# EAGLE board RelayBoard (EAGLE 9.7.0)
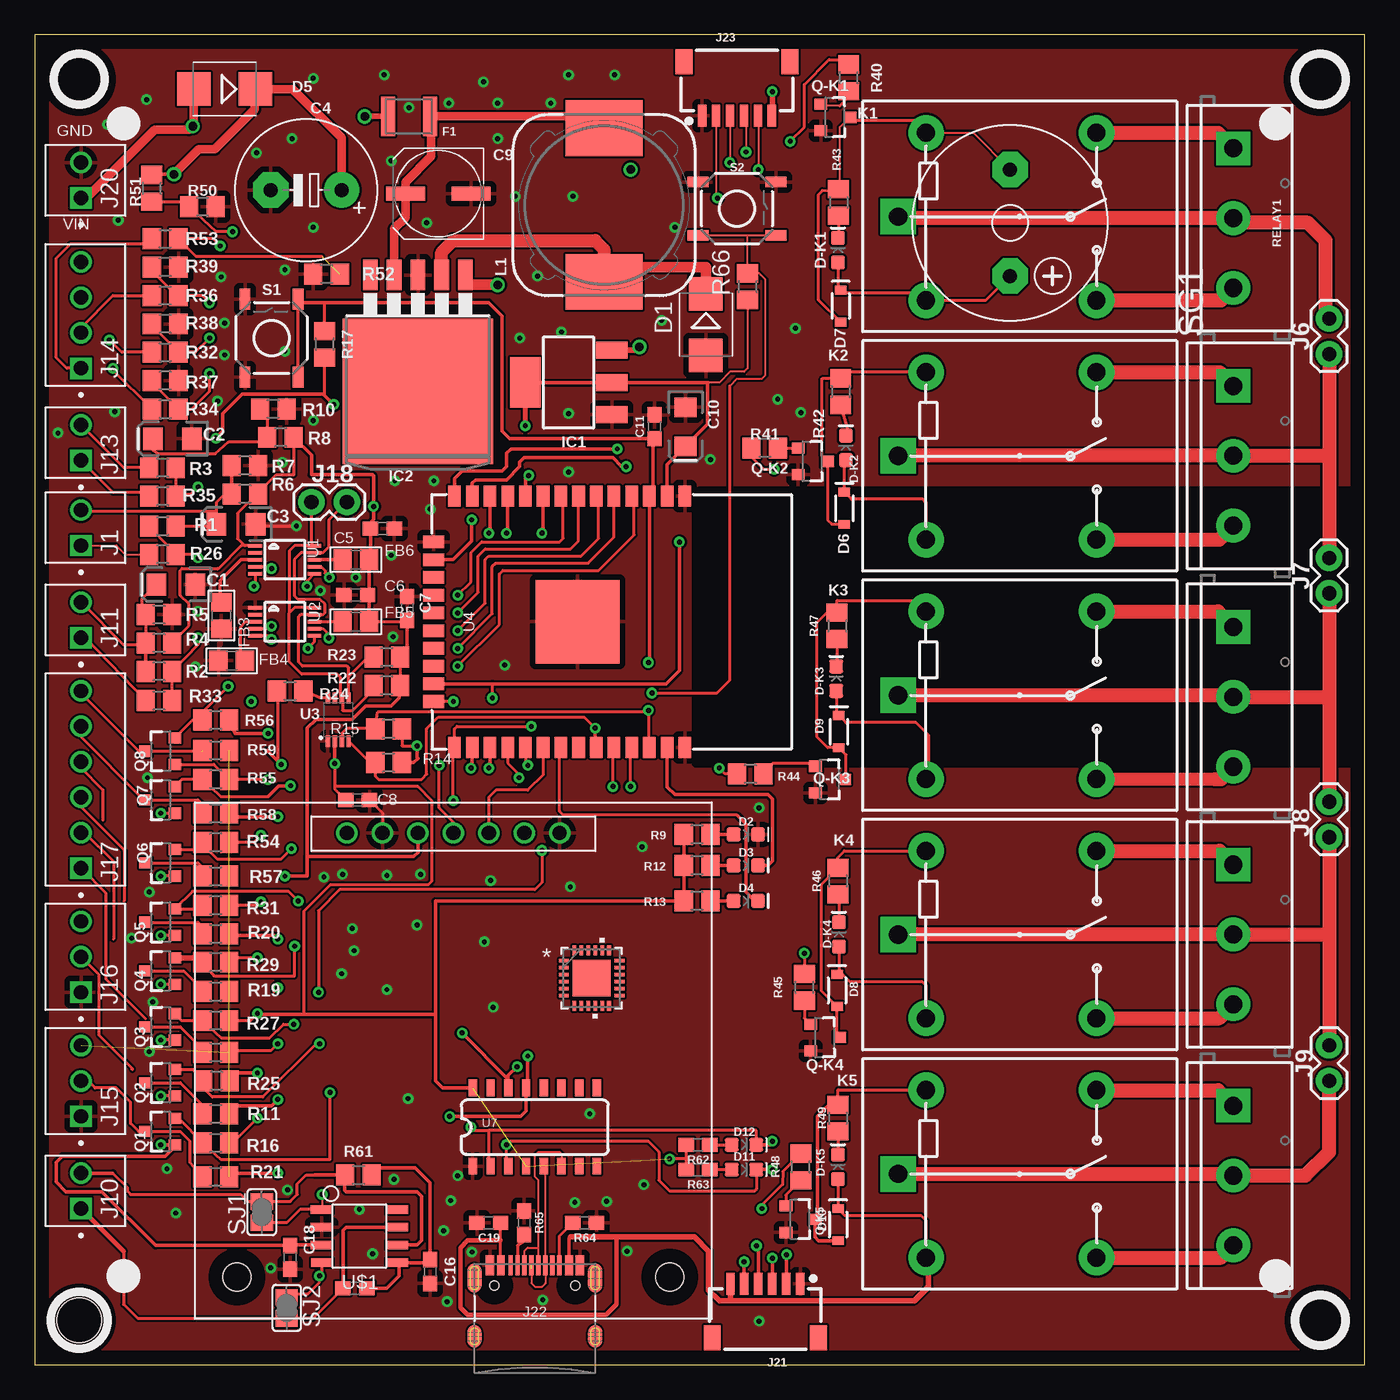
[diagram p0: board, top side]
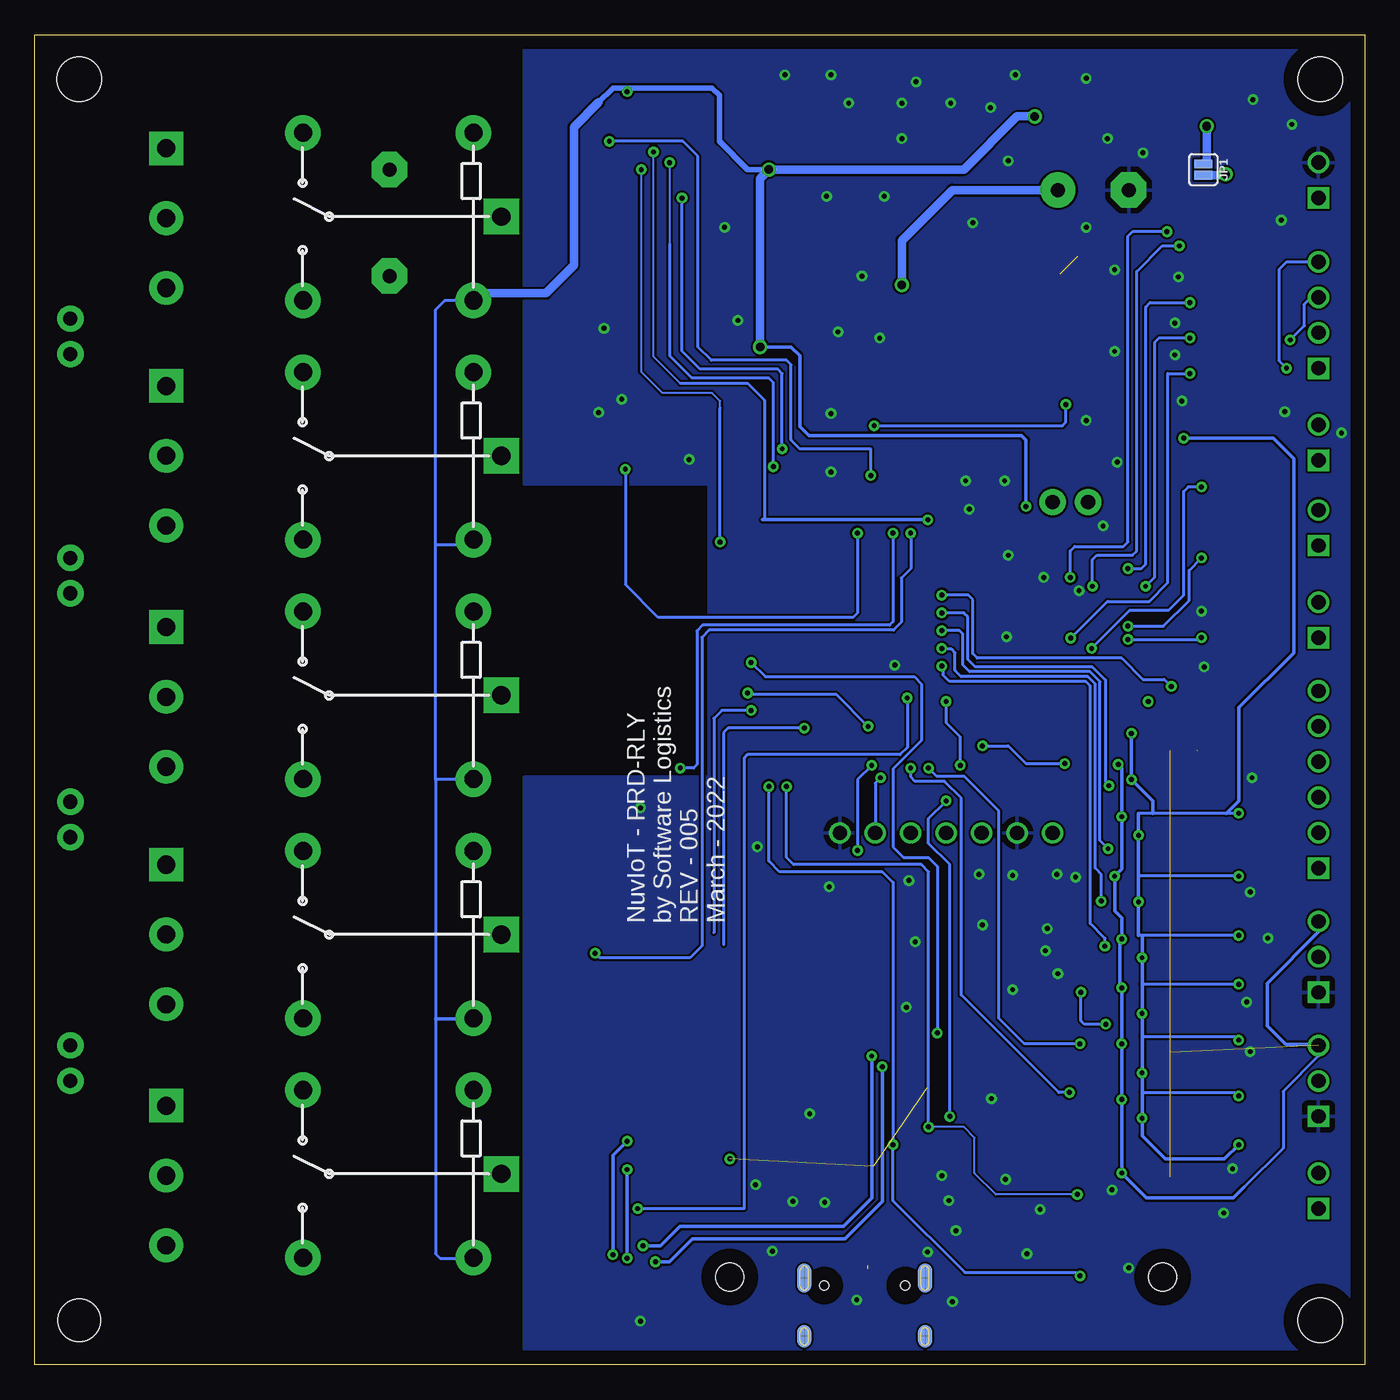
[diagram p1: board, bottom side, seen from below]

Size 95.25 x 95.25 mm. Coordinates in mm from the lower left corner, seen from the top.
Outline: 0,0 95.25,0 95.25,95.25 0,95.25 0,0
Copper layers (1*16): Top 0.035mm / dielectric 1.5mm / Bottom 0.035mm
Design rules "Fusion Electronics Design Rules": minimum track width 6mil, minimum drill 0.35mm, track to track 6mil, track to pad 6mil, pad to pad 6mil, via to via 6mil, smd to smd 6mil, copper to edge 40mil, drill to drill 6mil, minimum pad ring 10mil, minimum via ring 8mil, stop-mask expansion 4mil, vias tented up to drill 0mil, thermal gap 16mil
Net classes: 1 5V Power: width 0.203 mm; 2 VCC: width 0.25 mm; 3 LOGIC: width 0.203 mm
Holes 3.17 mm at 92.08,92.08 3.17,3.17 3.17,92.08
Holes 3.05 mm at 92.08,3.17

## Footprints (pad centres in the part's own frame; a part is rotated, then mirrored left to right if it is on the bottom)
EIA3216 = smd 1.4 x 1.6: + 1.4,0; - -1.4,0
E5-10,5 = drill 1.016 pad 2.54: + -2.54,0 | drill 1.016 pad 2.54 octagon: - 2.54,0
0603 = smd 1.1 x 1: 1 -0.85,0; 2 0.85,0
UD-6,3X5,8_NICHICON = smd 2.8 x 1: + 2.35,0; - -2.35,0
SMB = smd 2.4 x 2.4: A 2.2,0; C -2.2,0
LED-0603 = smd 1 x 1: A -0.877,0; C 0.877,0
LED-0603@1 = smd 1 x 1: A -0.877,0; C 0.877,0
SOD-323 = smd 0.63 x 0.83: A 1.15,0; C -1.15,0
1210 = smd 1 x 2.8: 1 -1.5,0; 2 1.5,0
0805 = smd 1.3 x 1.5: 1 -0.95,0; 2 0.95,0
SOT223 = smd 1.219 x 2.235: 1 -2.311,-3.099; 2 0,-3.099; 3 2.311,-3.099 | smd 3.6 x 2.2: TAB 0,3.099
TO263-5 = smd 1.067 x 2.159: 1 -3.404,-5.791; 2 -1.702,-5.791; 3 0,-5.791; 4 1.702,-5.791; 5 3.404,-5.791 | smd 10.8 x 10.41: 6 0,2.54
TE_640456-2 = drill 1.02 pad 1.37 square: 1 0,0 | drill 1.02 pad 1.37: 2 -2.54,0
1X02 = drill 1.016 pad 1.88: 1 0,0; 2 2.54,0
TE_640456-4 = drill 1.02 pad 1.37 square: 1 0,0 | drill 1.02 pad 1.37: 2 -2.54,0; 3 -5.08,0; 4 -7.62,0
TE_640456-3 = drill 1.02 pad 1.37 square: 1 0,0 | drill 1.02 pad 1.37: 2 -2.54,0; 3 -5.08,0
TE_640456-6 = drill 1.02 pad 1.37 square: 1 0,0 | drill 1.02 pad 1.37: 2 -2.54,0; 3 -5.08,0; 4 -7.62,0; 5 -10.16,0; 6 -12.7,0
SIM7000A = drill 1.016: GND -16.3,7.62; GND2 -16.3,-5.08; PWRKEY -16.3,0; RX -16.3,5.08; SLEEP -16.3,-7.62; TX -16.3,2.54; VCC -16.3,-2.54 | hole 2: 15.5,-15.5; 15.5,15.5
JST-6-SMD-HORI-1.0MM = smd 0.6 x 1.55: 1 -2.5,-4.775; 2 -1.5,-4.775; 3 -0.5,-4.775; 4 0.5,-4.775; 5 1.5,-4.775; 6 2.5,-4.775 | smd 1.2 x 1.8: M1 -3.8,-0.9; M2 3.8,-0.9
USB-C-16P = smd 0.3 x 1.45: A5 -1.25,0; A6 -0.25,0; A7 0.25,0; A8 1.25,0; B5 1.75,0; B6 0.75,0; B7 -0.75,0; B8 -1.75,0 | smd 0.6 x 1.45: GND -3.225,0; GND2 3.225,0 | smd 1 x 2.1: SHLD1 -4.32,-0.915; SHLD2 4.32,-0.915 | smd 1 x 2.1 bottom: SHLD3 -4.32,-0.915; SHLD4 4.32,-0.915 | smd 1 x 1.6: SHLD5 -4.32,-5.095; SHLD8 4.32,-5.095 | smd 1 x 1.6 bottom: SHLD6 -4.32,-5.095; SHLD7 4.32,-5.095 | smd 0.55 x 1.45: VBUS1 -2.45,0; VBUS2 2.45,0 | hole 0.65: -2.89,-1.445; 2.89,-1.445
SMT-JUMPER_2_NO_SILK = smd 0.635 x 1.27: 1 -0.406,0; 2 0.406,0
RELAY_G5LE = drill 1.3 pad 2.54 square: 1 8.52,-0.005 | drill 1.3 pad 2.54: 2 6.52,5.995; 3 -5.68,5.995; 4 -5.68,-6.005; 5 6.52,-6.005
CDRH127/LD = smd 4 x 5.5: 1 -5.5,0; 2 5.5,0
SOT23-3 = smd 0.8 x 0.9: 1 -0.95,-1; 2 0.95,-1; 3 0,1.1
R0805 = smd 1.3 x 1.5: 1 -0.95,0; 2 0.95,0
SCREWTERMINAL-5MM-3 = drill 1.3 pad 2.413 square: 1 0,0 | drill 1.3 pad 2.413: 2 5,0; 3 10,0
TACTILE_SWITCH_SMD_5.2MM = smd 1.524 x 0.762: 1 -2.794,1.905; 2 2.794,1.905; 3 -2.794,-1.905; 4 2.794,-1.905
F/CM12P = drill 1.016 pad 2.54 octagon: + 3.81,0; - -3.81,0
SJ = smd 1.168 x 1.6: 1 -0.762,0; 2 0.762,0
MSOP10 = smd 0.25 x 1: 1 -1,-2.113; 2 -0.5,-2.113; 3 0,-2.113; 4 0.5,-2.113; 5 1,-2.113; 6 1,2.113; 7 0.5,2.113; 8 0,2.113; 9 -0.5,2.113; 10 -1,2.113
VSSOP_8PIN = smd 0.8 x 0.3: P1 -1.57,0.734; P2 -1.57,0.234; P3 -1.57,-0.266; P4 -1.57,-0.766; P5 1.53,-0.766; P6 1.53,-0.266; P7 1.53,0.234; P8 1.53,0.734
ESP-WROOM-32 = smd 0.9 x 1.5: 1 7.7,9; 2 6.43,9; 3 5.16,9; 4 3.89,9; 5 2.62,9; 6 1.35,9; 7 0.08,9; 8 -1.19,9; 9 -2.46,9; 10 -3.73,9; 11 -5,9; 12 -6.27,9; 13 -7.54,9; 14 -8.81,9; 25 -8.81,-9; 26 -7.54,-9; 27 -6.27,-9; 28 -5,-9; 29 -3.73,-9; 30 -2.46,-9; 31 -1.19,-9; 32 0.08,-9; 33 1.35,-9; 34 2.62,-9; 35 3.89,-9; 36 5.16,-9; 37 6.43,-9; 38 7.7,-9 | smd 1.5 x 0.9: 15 -10.3,5.715; 16 -10.3,4.445; 17 -10.3,3.175; 18 -10.3,1.905; 19 -10.3,0.635; 20 -10.3,-0.635; 21 -10.3,-1.905; 22 -10.3,-3.175; 23 -10.3,-4.445; 24 -10.3,-5.715 | smd 6 x 6: GND 0,0
SO016 = smd 0.6 x 1.2: 1 -4.445,-2.8; 2 -3.175,-2.8; 3 -1.905,-2.8; 4 -0.635,-2.8; 5 0.635,-2.8; 6 1.905,-2.8; 7 3.175,-2.8; 8 4.445,-2.8; 9 4.445,2.8; 10 3.175,2.8; 11 1.905,2.8; 12 0.635,2.8; 13 -0.635,2.8; 14 -1.905,2.8; 15 -3.175,2.8; 16 -4.445,2.8
QFN24_4X4X0P9_IVS = smd 0.711 x 0.254: 1 -1.994,1.25; 2 -1.994,0.75; 3 -1.994,0.25; 4 -1.994,-0.25; 5 -1.994,-0.75; 6 -1.994,-1.25; 13 1.994,-1.25; 14 1.994,-0.75; 15 1.994,-0.25; 16 1.994,0.25; 17 1.994,0.75; 18 1.994,1.25 | smd 0.254 x 0.711: 7 -1.25,-1.994; 8 -0.75,-1.994; 9 -0.25,-1.994; 10 0.25,-1.994; 11 0.75,-1.994; 12 1.25,-1.994; 19 1.25,1.994; 20 0.75,1.994; 21 0.25,1.994; 22 -0.25,1.994; 23 -0.75,1.994; 24 -1.25,1.994 | smd 2.743 x 2.642: 25 0,0
SN65HVD230 = smd 1.549 x 0.61: CANH 2.705,0.635; CANL 2.705,-0.635; GND -2.705,0.635; RS 2.705,1.905; RX -2.692,-1.905; TX -2.705,1.905; VCC -2.705,-0.635; VREF 2.705,-1.905

## Placement (x,y rotation side)
C1  10uF  [EIA3216]  10.1,55.88 180 top
C2  10uF  [EIA3216]  9.84,66.32 180 top
C3  10uF  [EIA3216]  14.41,60.2 180 top
C4  680uF  [E5-10,5]  19.43,84.14 180 top
C5  1.0uF  [0603]  24.89,59.88 180 top
C6  1.0uF  [0603]  22.99,55.12 0 top
C7  1.0uF  [0603]  26.67,54.17 270 top
C8  1.0uF  [0603]  23.11,40.45 180 top
C9  220uF  [UD-6,3X5,8_NICHICON]  28.89,83.88 180 top
C10  10uF  [EIA3216]  46.61,67.18 270 top
C11  2.2uF  [0603]  44.39,67.18 90 top
C16  2.2uF  [0603]  28.32,6.67 270 top
C18  1.0uF  [0603]  18.29,7.68 90 top
C19  0.1uF  [0603]  32.51,10.16 180 top
D1  [SMB]  48.07,74.49 270 top
D2  GREEN  [LED-0603]  50.93,37.97 0 top
D3  BLUE  [LED-0603@1]  50.93,35.75 0 top
D4  RED  [LED-0603@1]  50.93,33.21 0 top
D5  1N4002  [SMB]  13.59,91.38 180 top
D6  250mA/100V  [SOD-323]  57.98,61.35 270 top
D7  250mA/100V  [SOD-323]  57.72,75.83 270 top
D8  250mA/100V  [SOD-323]  57.47,26.8 270 top
D9  250mA/100V  [SOD-323]  57.59,45.34 270 top
D10  250mA/100V  [SOD-323]  57.53,10.03 270 top
D11  BLUE  [LED-0603]  50.8,13.97 0 top
D12  BLUE  [LED-0603]  50.8,15.75 0 top
D-K1  BLUE  [LED-0603@1]  57.53,79.83 90 top
D-K2  BLUE  [LED-0603@1]  58.1,65.67 90 top
D-K3  BLUE  [LED-0603@1]  57.41,49.14 90 top
D-K4  BLUE  [LED-0603@1]  57.59,30.81 90 top
D-K5  BLUE  [LED-0603@1]  57.53,14.16 90 top
F1  6V/2A  [1210]  26.8,89.41 180 top
FB3  MMZ2012Y152B  [0805]  13.36,53.66 270 top
FB4  MMZ2012Y152B  [0805]  14.1,50.42 180 top
FB5  MMZ2012Y152B  [0805]  22.99,53.21 0 top
FB6  MMZ2012Y152B  [0805]  22.99,57.66 0 top
IC1  [SOT223]  38.23,70.36 90 top
IC2  LM2596S  [TO263-5]  27.43,72.26 180 top
J1  640456-2  [TE_640456-2]  3.3,58.67 270 top
J6  [1X02]  92.71,74.93 270 top
J7  [1X02]  92.71,57.78 270 top
J8  [1X02]  92.71,40.32 270 top
J9  [1X02]  92.71,22.86 270 top
J10  640456-2  [TE_640456-2]  3.3,11.18 270 top
J11  640456-2  [TE_640456-2]  3.3,52.07 270 top
J13  640456-2  [TE_640456-2]  3.3,64.77 270 top
J14  640456-4  [TE_640456-4]  3.3,71.37 270 top
J15  640456-3  [TE_640456-3]  3.3,17.78 270 top
J16  640456-3  [TE_640456-3]  3.3,26.67 270 top
J17  640456-6  [TE_640456-6]  3.3,35.56 270 top
J18  [1X02]  19.81,61.79 0 top
J19  SIM7000A  [SIM7000A]  29.97,21.78 270 top
J20  640456-2  [TE_640456-2]  3.3,83.57 270 top
J21  BM06B-SRSS-TB  [JST-6-SMD-HORI-1.0MM]  52.32,1.02 180 top
J22  [USB-C-16P]  35.81,7.11 0 top
J23  BM06B-SRSS-TB  [JST-6-SMD-HORI-1.0MM]  50.29,94.23 0 top
JP1  JUMPER-SMT_2_NO_SILK  [SMT-JUMPER_2_NO_SILK]  11.56,85.6 270 bottom
K1  RELAY-SPDT  [RELAY_G5LE]  70.36,82.23 180 top
K2  RELAY-SPDT  [RELAY_G5LE]  70.36,65.09 180 top
K3  RELAY-SPDT  [RELAY_G5LE]  70.36,47.94 180 top
K4  RELAY-SPDT  [RELAY_G5LE]  70.36,30.8 180 top
K5  RELAY-SPDT  [RELAY_G5LE]  70.36,13.65 180 top
L1  CDRH127/LD  [CDRH127/LD]  40.77,83.06 90 top
Q1  BSS138  [SOT23-3]  9.02,16.7 90 top
Q2  BSS138  [SOT23-3]  9.02,20.19 90 top
Q3  BSS138  [SOT23-3]  9.02,24.19 90 top
Q4  BSS138  [SOT23-3]  9.02,28.19 90 top
Q5  BSS138  [SOT23-3]  9.02,31.69 90 top
Q6  BSS138  [SOT23-3]  9.02,35.94 90 top
Q7  BSS138  [SOT23-3]  9.02,40.45 90 top
Q8  BSS138  [SOT23-3]  9.02,43.94 90 top
Q-K1  600mA/40V  [SOT23-3]  57.29,89.34 270 top
Q-K2  600mA/40V  [SOT23-3]  55.67,64.7 270 top
Q-K3  600mA/40V  [SOT23-3]  56.91,41.91 270 top
Q-K4  600mA/40V  [SOT23-3]  56.56,23.43 270 top
Q-K5  600mA/40V  [SOT23-3]  54.8,10.41 270 top
R1  10k  [R0805]  9.14,60.07 0 top
R2  10k  [R0805]  8.89,49.66 180 top
R3  10k  [R0805]  9.14,64.24 180 top
R4  10k  [R0805]  8.89,51.69 180 top
R5  10k  [R0805]  8.89,53.72 180 top
R6  10k  [R0805]  15.05,62.36 180 top
R7  10k  [R0805]  15.05,64.4 180 top
R8  10k  [R0805]  17.59,66.42 180 top
R9  1k  [R0805]  47.43,37.97 180 top
R10  10k  [R0805]  17.08,68.45 180 top
R11  10k  [R0805]  12.95,17.97 0 top
R12  1k  [R0805]  47.43,35.75 180 top
R13  1k  [R0805]  47.43,33.21 180 top
R14  10k  [R0805]  25.34,43.12 180 top
R15  10k  [R0805]  25.34,45.53 180 top
R16  10k  [R0805]  12.95,15.88 180 top
R17  10k  [R0805]  20.76,73.09 90 top
R18  10k  [R0805]  12.95,22.38 0 top
R19  10k  [R0805]  12.95,26.73 0 top
R20  10k  [R0805]  12.95,30.86 0 top
R21  10k  [R0805]  12.95,13.46 0 top
R22  10k  [R0805]  25.21,48.64 180 top
R23  10k  [R0805]  25.21,50.67 180 top
R24  200k  [R0805]  18.29,48.26 0 top
R25  10k  [R0805]  13,20.32 180 top
R26  0 ohms  [R0805]  9.14,58.04 180 top
R27  10k  [R0805]  12.95,24.64 180 top
R29  10k  [R0805]  12.95,28.83 180 top
R31  10K  [R0805]  12.95,32.89 180 top
R32  10K  [R0805]  9.33,72.52 0 top
R33  0 ohms  [R0805]  8.89,47.56 180 top
R34  10K  [R0805]  9.33,68.45 0 top
R35  0 ohms  [R0805]  9.14,62.2 180 top
R36  0 ohms  [R0805]  9.33,76.58 0 top
R37  10K  [R0805]  9.33,70.48 180 top
R38  10k  [R0805]  9.33,74.55 180 top
R39  10k  [R0805]  9.33,78.61 180 top
R40  1k  [R0805]  58.29,92.18 90 top
R41  1k  [R0805]  52.28,65.66 180 top
R42  1k  [R0805]  57.72,69.7 270 top
R43  1k  [R0805]  57.57,83.25 270 top
R44  1k  [R0805]  51.24,42.32 180 top
R45  1k  [R0805]  55.12,27.03 90 top
R46  1k  [R0805]  57.53,34.63 270 top
R47  1k  [R0805]  57.47,52.92 270 top
R48  1k  [R0805]  54.86,14.16 90 top
R49  1k  [R0805]  57.53,17.65 270 top
R50  10k  [R0805]  12,82.93 180 top
R51  30K  [R0805]  8.38,84.26 90 top
R52  10k  [R0805]  20.89,78.11 180 top
R53  0 ohms  [R0805]  9.33,80.64 0 top
R54  10k  [R0805]  12.95,37.4 180 top
R55  10k  [R0805]  12.95,41.91 180 top
R56  10K  [R0805]  12.95,46.16 180 top
R57  10k  [R0805]  12.95,34.99 0 top
R58  10k  [R0805]  12.95,39.5 0 top
R59  10k  [R0805]  12.95,44.01 0 top
R60  1k  [0603]  22.92,5.46 180 top
R61  1k  [R0805]  23.18,13.59 0 top
R62  1k  [0603]  47.5,15.75 180 top
R63  1k  [0603]  47.5,13.97 180 top
R64  5.1k  [0603]  39.37,10.16 180 top
R65  5.1k  [0603]  35.05,10.16 270 top
R66  10k  [R0805]  51.05,77.22 90 top
RELAY1  455-1750-1-ND  [SCREWTERMINAL-5MM-3]  85.85,87.12 270 top
RELAY2  455-1750-1-ND  [SCREWTERMINAL-5MM-3]  85.85,70.1 270 top
RELAY3  455-1750-1-ND  [SCREWTERMINAL-5MM-3]  85.85,52.83 270 top
RELAY4  455-1750-1-ND  [SCREWTERMINAL-5MM-3]  85.85,35.81 270 top
RELAY5  455-1750-1-ND  [SCREWTERMINAL-5MM-3]  85.85,18.54 270 top
S1  MOMENTARY-SWITCH-SPST-SMD-5.2-REDUNDANT  [TACTILE_SWITCH_SMD_5.2MM]  16.95,73.53 90 top
S2  MOMENTARY-SWITCH-SPST-SMD-5.2-REDUNDANT  [TACTILE_SWITCH_SMD_5.2MM]  50.29,82.8 0 top
SG1  F/CM12P  [F/CM12P]  69.85,81.79 270 top
SJ1  [SJ]  16.26,10.92 90 top
SJ2  [SJ]  18.03,4.06 270 top
U1  ADS1115IDGST  [MSOP10]  17.91,57.66 270 top
U2  ADS1115IDGST  [MSOP10]  17.91,53.21 270 top
U3  [VSSOP_8PIN]  21.72,46.23 90 top
U4  ESP-WROOM-32  [ESP-WROOM-32]  38.86,53.21 0 top
U7  CH340C  [SO016]  35.81,17.02 0 top
U8  MPU-6050QFN24_4X4X0P9_IVS  [QFN24_4X4X0P9_IVS]  39.88,27.69 0 top
U$2  SN65HVD230  [SN65HVD230]  23.24,9.21 0 top

## Library data of the parts
C1-C3 C10 = SparkFun-Capacitors; PROD_ID: CAP-00811
C4 = rcl; VOLTAGE: 25V
C5-C8 C18 = SparkFun-Capacitors; PROD_ID: CAP-00868
C9 = rcl; VOLTAGE: 6.3V
C11 C16 = SparkFun-Capacitors; PROD_ID: CAP-07888
C19 = SparkFun-Capacitors; PROD_ID: CAP-00810
D1 D5 = diode
D2 D11 = SparkFun-LED; PROD_ID: DIO-00821
D3 D-K1-D-K5 = SparkFun-LED; PROD_ID: DIO-08575
D4 = SparkFun-LED; PROD_ID: DIO-00819
D6-D10 = SparkFun-DiscreteSemi; PROD_ID: DIO-09646
D12 = SparkFun-LED; PROD_ID: DIO-09003
F1 = SparkFun-Fuses; PROD_ID: RES-14313
FB3-FB6 U1 U2 = microbuilder
IC1 = lm1117
IC2 = national-semiconductor; MF: NATIONAL SEMICONDUCTOR; MPN: LM2596S-ADJ/NOPB; OC_FARNELL: 9494367; OC_NEWARK: 41K3842
J1 J10 J11 J13 J20 = 640456-2; COMMENT: 640456-2; DESCRIPTION: Connector Header Through Hole 2 position 0.100 (2.54mm); DIGI-KEY_PART_NUMBER: A1921-ND; EU_ROHS_COMPLIANCE: Compliant; MF: TE Connectivity; MP: 640456-2; PACKAGE: None; PURCHASE-URL: https://pricing.snapeda.com/search/part/640456-2/?ref=eda
J6-J9 J18 = SparkFun-Connectors
J14 = 640456-4; CENTERLINE_PITCH: 2.54 mm[.1 in]; COMMENT: 640456-4; DESCRIPTION: Header, Friction Lock; MTA-100; 4; 250 VAC; Polyester; Tin; Copper Alloy; Tin; DIGI-KEY_PART_NUMBER: A1922-ND; EU_ROHS_COMPLIANCE: Compliant; MF: TE Connectivity; MP: 640456-4; NUMBER_OF_POSITIONS: 4; PACKAGE: None; PRODUCT_TYPE: Connector; PURCHASE-URL: https://pricing.snapeda.com/search/part/640456-4/?ref=eda
J15 J16 = 640456-3; COMMENT: 640456-3; DESCRIPTION: Connector Header Through Hole 3 position 0.100 (2.54mm); DIGI-KEY_PART_NUMBER: A19470-ND; EU_ROHS_COMPLIANCE: Compliant; MF: TE Connectivity; MP: 640456-3; PACKAGE: None; PURCHASE-URL: https://pricing.snapeda.com/search/part/640456-3/?ref=eda
J17 = 640456-6; CENTERLINE_PITCH: 2.54 mm[.1 in]; COMMENT: 640456-6; DESCRIPTION: Header, Friction Lock; MTA-100; 6; 250 VAC; Polyester; Tin; Copper Alloy; Tin; DIGI-KEY_PART_NUMBER: A1923-ND; EU_ROHS_COMPLIANCE: Compliant; MF: TE Connectivity; MP: 640456-6; NUMBER_OF_POSITIONS: 6; PACKAGE: None; PRODUCT_TYPE: Connector; PURCHASE-URL: https://pricing.snapeda.com/search/part/640456-6/?ref=eda
J19 U$2 = SoftwareLogisticsParts
J21 J23 = SparkFun-Connectors; PROD_ID: XXX-00000
J22 = SparkFun-Connectors; PROD_ID: CONN-14122
JP1 = SparkFun-Jumpers
K1-K5 = SparkFun-Electromechanical; PROD_ID: COMP-14214
L1 = inductor-sumida
Q1-Q8 = SparkFun
Q-K1-Q-K5 = SparkFun-DiscreteSemi; PROD_ID: TRANS-08049
R1-R27 R29 R31-R59 R61 R66 = rcl; SPICEPREFIX: R
R60 R62 R63 = SparkFun-Resistors; PROD_ID: RES-07856
R64 R65 = SparkFun-Resistors; PROD_ID: RES-12083
RELAY1-RELAY5 = SparkFun-Connectors; PROD_ID: CONN-10134; SF_SKU: PRT-08433
S1 S2 = SparkFun-Switches; PROD_ID: SWCH-08247; SF_SKU: COM-08720
SG1 = buzzer; OC_FARNELL: unknown; OC_NEWARK: unknown
SJ1 SJ2 = jumper
U3 = SparkFun-IC-Comms; PROD_ID: IC-14450
U4 = esp32
U7 = SparkFun-IC-Comms; PROD_ID: IC-14038
U8 = 2024-01-01_22-56-14_Library; COPYRIGHT: Copyright (C) 2024 Ultra Librarian. All rights reserved.; MANUFACTURER_PART_NUMBER: MPU-6050; MFR_NAME: InvenSense

## Nets
3.3V: C8.2 C10.+ C18.2 IC1.2 IC1.TAB Q1.1 Q2.1 Q3.1 Q4.1 Q5.1 Q6.1 Q7.1 Q8.1 R9.2 R12.2 R13.2 R14.1 R15.1 R16.1 R17.1 R25.1 R27.1 R29.1 R31.1 R54.1 R55.1 R56.1 R62.2 R63.2 R66.1 U3.P2 U4.2 U7.4 U7.16 U$2.VCC
5V [5V Power]: J15.3 J16.3 R11.2 R18.2 R19.2 R20.2 R21.2 R57.2 R58.2 R59.2
5VREF-EN: R24.2 U3.P7 U3.P8
+5V [5V Power]: C5.2 C6.2 C7.2 C19.1 D6.C D7.C D8.C D9.C D10.C D-K1.A D-K2.A D-K3.A D-K4.A D-K5.A F1.2 FB5.2 FB6.2 IC1.3 J19.VCC J21.6 J22.VBUS1 J22.VBUS2 J23.6 K1.2 K2.2 K3.2 K4.2 K5.2 R4.1 R6.1 R8.1 R22.1 R23.1 R24.1 SG1.+ U1.1
ADC1: R2.1 R33.1 U2.5
ADC1-IN: J11.1 R33.2
ADC1-NEG: C1.+ J11.2 R2.2 R4.2 R5.2
ADC2 [ADC]: R1.1 R26.1 U2.4
ADC2-NEG: C3.+ J1.2 R1.2 R6.2 R7.2
ADC3 [ADC]: R3.1 R35.1 U2.6
ADC3-IN: J13.1 R35.2
ADC3-NEG: C2.+ J13.2 R3.2 R8.2 R10.2
ADC4 [ADC]: R34.2 R37.2 U2.7
ADC4-IN: J14.4 R34.1
ADC5 [ADC]: R32.2 R38.2 U1.5
ADC5-IN: J14.3 R32.1
ADC6 [ADC]: R36.2 R39.2 U1.4
ADC6-IN: J14.2 R36.1
ADC7 [ADC]: R52.1 R53.2 U1.6
ADC7-IN: J14.1 R53.1
ADC8 [ADC]: R50.2 R51.1 U1.7
BOOT: J21.4 R66.2 S2.3 S2.4 U4.25 U7.13
CC1: J22.A5 R65.2
CC2: J22.B5 R64.2
D+1: J22.A6 J22.B6 U7.5
D-1: J22.A7 J22.B7 U7.6
ERR_LED: D4.C U4.31
GND: C1.- C2.- C3.- C4.- C5.1 C6.1 C7.1 C8.1 C9.- C10.- C11.2 C16.2 C18.1 C19.2 D1.A D2.C FB3.2 FB4.2 IC1.1 IC2.3 J15.1 J16.1 J19.GND J19.GND2 J20.2 J21.1 J22.GND J22.GND2 J23.1 Q-K1.2 Q-K2.2 Q-K3.2 Q-K4.2 Q-K5.2 R5.1 R7.1 R10.1 R37.1 R38.1 R39.1 R50.1 R52.2 R64.1 R65.1 S1.1 S1.2 S2.1 S2.2 U2.1 U3.P1 U4.1 U4.15 U4.38 U4.GND U7.1 U$2.GND
GPIO1: Q1.2 R16.2 U4.27
GPIO2: Q2.2 R25.2 U4.26
GPIO3: Q3.2 R27.2 U4.29
GPIO4: Q4.2 R29.2 U4.4
GPIO5: Q5.2 R31.2 U4.5
GPIO6: Q6.2 R54.2 U4.6
GPIO7: Q7.2 R55.2 U4.7
GPIO8: Q8.2 R56.2 U4.8
GPIO-1 [LOGIC]: J15.2
GPIO-2 [LOGIC]: J16.2
GPIO-3: J17.1
GPIO-4: J17.2
GPIO-5: J17.3
GPIO-6: J17.4
GPIO-7: J17.5
GPIO-8: J17.6 Q8.3 R59.1
K1-CTL [LOGIC]: R40.2 U4.10
K2-CTL [LOGIC]: R41.2 U4.9
K3-CTL [LOGIC]: R44.2 U4.11
K4-CTL [LOGIC]: R45.2 U4.12
M-PWRKEY: J19.PWRKEY U4.24
M-SCL [LOGIC]: R15.2 U3.P3 U4.36
M-SDA [LOGIC]: R14.2 U3.P4 U4.33
M-SIMRX: J19.TX U4.30
M-SIMTX: J19.RX U4.28
M-UART0RX: D12.C J21.2 SJ1.1 U4.34 U7.2 U$2.TX
M-UART0TX: D11.C J21.3 SJ2.1 U4.35 U7.3 U$2.RX
MT-CK: J23.4 U4.16
MT-DI: J23.2 U4.14
MT-DO-K5-CTL: J23.5 R48.2 U4.23
MT-MS: J23.3 U4.13
N$1: D5.A J20.1 JP1.1
N$2: FB3.1 U1.3
N$3: J6.1 K1.1 RELAY1.2
N$4: FB4.1 U2.3
N$6: D2.A R9.1
N$7: D11.A R63.1
N$9: C9.+ F1.1 IC2.4 L1.2
N$10: FB5.1 U2.8
N$11: D6.A K2.5 Q-K2.3 R42.1
N$12: D3.A R12.1
N$13: D4.A R13.1
N$14: D7.A K1.5 Q-K1.3 R43.1 SG1.-
N$15: FB6.1 U1.8
N$16: D-K2.C R42.2
N$17: D-K1.C R43.2
N$18: Q-K1.1 R40.1
N$19: D12.A R62.1
N$20: Q-K2.1 R41.1
N$21: D8.A K4.5 Q-K4.3 R46.1
N$22: D9.A K3.5 Q-K3.3 R47.1
N$23: D-K4.C R46.2
N$24: D-K3.C R47.2
N$25: Q-K3.1 R44.1
N$26: Q-K4.1 R45.1
N$27: J8.2 J9.1 K4.1 RELAY4.2
N$28: K4.3 RELAY4.3
N$29: J6.2 J7.1 K2.1 RELAY2.2
N$30: K2.3 RELAY2.3
N$31: K2.4 RELAY2.1
N$33: K1.3 RELAY1.3
N$34: K1.4 RELAY1.1
N$35: K4.4 RELAY4.1
N$36: J7.2 J8.1 K3.1 RELAY3.2
N$37: K3.3 RELAY3.3
N$38: K3.4 RELAY3.1
N$39: D10.A K5.5 Q-K5.3 R49.1
N$40: D-K5.C R49.2
N$41: Q-K5.1 R48.1
N$42: J9.2 K5.1 RELAY5.2
N$43: K5.3 RELAY5.3
N$44: K5.4 RELAY5.1
N$45: J1.1 R26.2
N$46: C16.1 R60.1 R61.2 U$2.VREF
N$47: J10.1 R60.2 SJ2.2 U$2.CANH
N$48: J10.2 R61.1 SJ1.2 U$2.CANL
N$49: Q3.3 R18.1
N$50: Q4.3 R19.1
N$51: Q5.3 R20.1
N$52: Q6.3 R57.1
N$53: Q7.3 R58.1
N$55 [LOGIC]: Q1.3 R21.1
N$57 [LOGIC]: Q2.3 R11.1
ONLINE_LED: D3.C U4.37
OUT [ADC]: D1.C IC2.2 L1.1
RESET: C11.1 J21.5 R17.2 S1.3 S1.4 U4.3 U7.14
SCL [LOGIC]: J18.1 R22.2 U1.10 U2.10 U3.P6
SDA [LOGIC]: J18.2 R23.2 U1.9 U2.9 U3.P5
SHLD: J22.SHLD1 J22.SHLD2 J22.SHLD3 J22.SHLD4 J22.SHLD5 J22.SHLD6 J22.SHLD7 J22.SHLD8
VDD: U8.13
VIN-DC: C4.+ D5.C IC2.1 JP1.2 R51.2
VLOGIC: U8.8

## Tracks (layer width: path | path; a pad name or v marks a point on that pad's centre or on a via)
3.3V  (via drill 0.35)  (2 unrouted)
  Top 0.152: 48.26,70.36 49.02,70.36 49.78,71.12 50.8,71.12 51.05,71.37 R66.1
  Top 0.203: 46.48,32.58 46.48,33.11 R13.2 | Q2.1 v9.02,19.24 | v21.48,43.05 21.48,41.4 | 21.48,41.4 21.48,41.23 C8.2 | v27.37,44.32 26.29,44.32 R15.1 | v16.19,37.91 15.68,37.4 R54.1 | v16.19,33.15 15.94,32.89 R31.1 | v15.94,29.15 13.91,29.15 R29.1 | R27.1 15.43,24.64 v15.94,25.15 | R16.1 14.16,15.88 v15.94,17.65 | Q3.1 v9.02,23.24 | Q4.1 v9.02,27.24 | Q5.1 v9.02,30.73 | Q6.1 v9.02,34.99 | Q7.1 v9.02,39.5 | v16.7,41.91 R55.1 12.82,42.99 Q8.1 | v21.4,68.77 20.77,69.41 R17.1 | R62.2 46.65,14.73 | 46.65,14.73 R63.2 | 46.65,14.73 v45.47,14.73 | 19.3,25.08 19.3,32.51 21.18,34.39 28.19,34.39 28.45,34.65 28.45,40.39 27.43,41.4 21.48,41.4
  Top 0.254: IC1.TAB IC1.2 48.26,70.36 48.2,70.29 48.2,67.37 C10.+ 45.29,64.47 U4.2 | R9.2 R12.2 R13.2 28.7,33.21 28.7,25.08 | 28.7,25.08 19.3,25.08 16,25.08 v15.94,25.15 | v16.7,45.21 14.36,45.21 R56.1 | U$2.VCC 18.33,8.57 C18.2 8.64,8.53 4.79,12.38 2.22,12.38 1.52,13.08 1.52,14.48 1.97,14.92 9.34,14.92 10.09,15.68 Q1.1 v9.02,15.75 | v21.4,68.77 20.64,69.53 14.86,69.53 13.46,68.14 13.46,66.86 v12.95,66.36 | U3.P2 v21.48,43.05 | R25.1 14.41,20.89 v15.94,20.89 | v27.37,44.32 27.37,43.5 27.43,43.43 27.11,43.12 R14.1 | U7.16 29.21,19.81 28.7,20.32 28.7,25.08
  Top 0.356: IC1.TAB v35.13,67.26
  Bottom 0.203: v27.37,44.32 25.53,44.32 24.26,43.05 v21.48,43.05 | 15.94,19.49 9.27,19.49 v9.02,19.24 | v9.02,23.24 9.27,23.5 15.94,23.5 | v9.02,27.24 15.94,27.24 | v9.02,30.73 15.94,30.73 16.19,30.73 | v9.02,34.99 16.19,34.99 | v9.02,39.5 9.91,39.5 15.18,39.5 16.19,39.5 | v35.13,67.26 21.64,67.26 21.4,67.5 v21.4,68.77
  Bottom 0.254: v16.7,45.21 v16.7,41.91 15.18,40.39 15.18,39.5 | 16.19,39.5 v16.19,37.91 16.19,34.99 v16.19,33.15 16.19,30.73 | 15.94,30.73 v15.94,29.15 15.94,27.24 v15.94,25.15 15.94,23.5 v15.94,20.89 15.94,19.49 v15.94,17.65 15.94,16.38 14.29,14.73 10.03,14.73 v9.02,15.75 | v12.95,66.36 6.54,66.36 5.08,64.9 5.08,50.99 9.02,47.05 9.02,40.39 9.91,39.5
5V  (8 unrouted)
  Bottom 0.254: J16.3 3.3,30.99 6.99,27.3 6.99,24.26 5.65,22.92 3.37,22.92 J15.3
5VREF-EN
  Top 0.203: R24.2 20.43,47.76 U3.P8 U3.P7
+5V  (via drill 0.35, 0.61)
  Top 0.203: R23.1 R22.1 | R4.1 9.84,51.75 11.05,52.96 11.05,54.47 10.41,55.1 10.41,56.9 10.55,57.03 13.07,57.03 13.11,56.99 14.78,58.66 U1.1 15.03,58.66 14.52,59.17 14.52,60.98 15.84,62.29 | 15.84,62.29 R6.1 | D-K5.A D10.C 58.04,10.68 63.49,10.68 63.84,10.33 K5.2 | D-K2.A 57.98,64.67 D6.C 58.48,61.99 63.61,61.99 63.84,61.77 K2.2 | D-K3.A 57.41,46.67 D9.C 58.1,45.98 63.11,45.98 64.01,45.09 64.01,42.12 K3.2 | D8.C 57.85,27.95 | 63.84,27.16 63.55,27.45 58.36,27.45 57.85,27.95 | D-K4.A 57.59,28.21 57.85,27.95 | D-K1.A 57.53,77.17 D7.C 57.95,76.75 63.33,76.75 K1.2 68.11,76.24 SG1.+ | FB5.2 26.57,53.21 C7.2 | R24.1 17.4,48.2 17.4,43.24 v17.65,42.99 | 14.16,22.48 16.89,22.48 v17.4,22.99 | 15.84,62.29 17.29,63.75 18.54,63.75 R8.1 | J22.VBUS1 33.36,8.89 C19.1
  Top 0.254: FB5.2 23.94,55.02 C6.2 23.94,55.22 FB6.2 24.04,57.76 C5.2 23.98,60.24 24.26,60.52 v24.26,61.47 24.26,63.69 24.19,63.75 19.81,63.75 19.81,65.15 R8.1 | 19.49,36.39 19.49,34.99 v17.91,34.99 | R22.1 26.08,47.74 25.53,47.18 23.69,47.18 22.74,46.23 20.13,46.23 19.49,45.59 19.49,36.39 | 16.64,44.01 v17.65,42.99 | 17.14,26.73 v17.4,26.99 | v17.4,30.48 17.14,30.73 14.16,30.73 | v17.4,39.24 14.06,39.24 | C7.2 26.67,51.28 R23.1 | J19.VCC 27.43,36.7 27.11,36.39 19.49,36.39 | 63.84,27.16 K4.2 | 14.16,13.72 v17.4,13.72 | v17.4,18.99 16.95,18.54 14.48,18.54 | J22.VBUS2 38.26,9.05 38.35,9.14 | 64.01,7.49 K5.2
  Top 0.305: 41.66,9.14 41.66,4.32 40.89,3.56 30.99,3.56 30.48,4.06 30.48,8.38 30.99,8.89 33.36,8.89
  Top 0.406: IC1.3 43.08,72.67 v43.31,72.9 | v23.62,89.41 F1.2 | 38.35,9.14 41.66,9.14 47.24,9.14 48.26,8.13 48.26,5.33 49.02,4.57 49.78,4.57 | J23.6 52.83,89.5 v52.83,91.19 | 64.01,7.49 64.01,5.59 62.99,4.57 49.78,4.57 | J21.6 49.82,4.61 49.78,4.57
  Bottom 0.203: K3.2 63.88,41.91 66.55,41.91 | 66.55,41.91 66.55,24.77 66.55,7.94 66.23,7.62 63.88,7.62 K5.2 | 66.55,41.91 66.55,58.74 | 66.55,58.74 66.55,75.56 65.88,76.24 K1.2 | 66.55,58.74 64.19,58.74 63.88,59.05 | 8.64,12.7 5.84,15.49 5.84,19.56 3.3,22.1
  Bottom 0.254: v17.65,42.99 17.4,42.74 v17.4,39.24 17.4,35.5 v17.91,34.99 17.91,32.51 17.4,32 v17.4,30.48 17.53,30.35 17.53,27.11 v17.4,26.99 v17.4,22.99 v17.4,18.99 v17.4,13.72 15.62,11.94 9.4,11.94 8.64,12.7 | 63.88,59.05 K2.2 | v24.26,61.47 24.26,66.23 24.57,66.55 39.81,66.55 40.45,67.18 40.45,72.26 41.08,72.9 v43.31,72.9 | 66.55,24.77 63.88,24.77 K4.2
  Bottom 0.406: v42.67,85.6 44.2,85.6 46.23,87.63 46.23,90.93 46.74,91.44 52.83,91.44 | 52.83,91.44 53.85,91.44 54.86,90.42 | v52.83,91.19 52.83,91.44
  Bottom 0.61: v43.31,72.9 43.31,84.96 v42.67,85.6 28.7,85.6 24.89,89.41 v23.62,89.41 | K1.2 63.33,76.75 58.64,76.75 56.64,78.74 56.64,88.65 54.86,90.42
ADC1  (via drill 0.35)
  Top 0.203: R33.1 R2.1 11.68,51.59 v11.68,52.07 | U2.5 16.68,52.21 v16.95,51.94
  Bottom 0.203: v11.68,52.07 11.68,51.94 v16.95,51.94
ADC1-IN
  Top 0.203: J11.1 3.6,52.07 R33.2
ADC1-NEG
  Top 0.203: R4.2 7.56,52.17 7.53,51.56 6.35,51.56 J11.2 | R4.2 R5.2 7.66,53.88 7.66,54.84 C1.+ | 7.94,51.31 R4.2
  Top 0.254: R2.2 7.94,51.31
ADC2  (via drill 0.35)
  Top 0.203: R1.1 R26.1 11.43,58.04 v11.68,57.78 | U2.4 16.77,52.71 v16.95,52.9
  Bottom 0.203: v16.95,52.9 14.41,52.9 12.57,54.74 12.57,56.9 v11.68,57.78
ADC2-NEG
  Top 0.152: J1.2 3.43,61.21 3.49,61.15
  Top 0.203: C3.+ 13.01,61.15 3.49,61.15 | C3.+ 13.01,61.78 13.59,62.36 R6.2 | R1.2 12.89,60.07 C3.+
  Top 0.254: R7.2 R6.2
ADC3  (via drill 0.35)
  Top 0.203: R3.1 R35.1 11.18,62.36 v11.68,62.87 | U2.6 20.02,51.77 v19.56,51.31
  Bottom 0.203: v11.68,62.87 12.64,62.87 12.95,62.55 12.95,55.12 14.03,54.04 16.83,54.04 v19.56,51.31
ADC3-IN
  Top 0.203: J13.1 5.59,62.48 6.6,62.48 8.07,62.48 R35.2
ADC3-NEG
  Top 0.203: 8.79,65.25 8.79,65.14 8.5,64.42 8.51,64.41 R3.2 8.17,64.26 6.35,64.26 J13.2 | 8.79,65.25 12.92,65.25 13.89,66.12 16.33,66.12 R8.2 16.64,67.94 R10.2 | C2.+ 8.44,65.5 8.79,65.25
ADC4  (via drill 0.35)
  Top 0.203: R37.2 8.32,70.42 R34.2 11.24,68.45 12.51,69.72 v12.51,70.99 | U2.7 20.63,52.71 21.08,52.26 21.08,52.08 v21.05,52.05
  Bottom 0.203: v21.05,52.05 18.43,54.67 15.43,54.67 14.1,56.01 14.1,70.99 v12.51,70.99
ADC4-IN  (via drill 0.35)
  Top 0.203: v5.59,71.37 5.59,71.25 R34.1
  Bottom 0.203: v5.59,71.37 6.1,71.88 6.1,78.49 5.59,78.99 J14.4
ADC5  (via drill 0.35)
  Top 0.203: v12.51,73.53 11.49,72.52 R32.2 8.38,74.42 R38.2 | U1.5 15.79,55.75 v15.68,55.75
  Bottom 0.203: v12.51,73.53 14.73,73.53 15.05,73.22 15.05,56.39 v15.68,55.75
ADC5-IN  (via drill 0.35)
  Top 0.203: R32.1 6.22,72.52 v5.33,73.41
  Bottom 0.203: v5.33,73.41 4.32,74.42 4.32,75.95 3.81,76.45 J14.3
ADC6  (via drill 0.35)
  Top 0.203: R39.2 8.38,78.34 10.15,76.58 R36.2 12,76.58 v12.51,76.07 | U1.4 16.82,57.16 v16.95,57.02
  Bottom 0.203: v16.95,57.02 16,57.02 15.68,57.34 15.68,63.25 15.68,75.75 15.37,76.07 v12.51,76.07
ADC6-IN
  Top 0.203: R36.1 5.59,76.58 3.3,74.3 J14.2
ADC7  (via drill 0.35)  (1 unrouted)
  Top 0.203: 20.57,79.38 11.55,79.38 R53.2 12.76,80.64 v13.27,80.14 | U1.6 19.49,56.13 v19.49,55.75
  Bottom 0.203: v19.49,55.75 19.49,57.66 19.18,57.98 16.64,57.98 16.32,58.29 16.32,78.3 14.48,80.14 v13.27,80.14
ADC7-IN
  Top 0.203: R53.1 8,80.26 2.54,80.26 1.52,79.25 1.52,72.14 2.29,71.37 J14.1
ADC8  (via drill 0.35)
  Top 0.203: v21.08,56.39 20.77,56.7 20.77,56.89 20.5,57.16 U1.7 | v14.16,81.15 12.97,81.15 R50.2 11.44,83.31 R51.1
  Bottom 0.203: v21.08,56.39 21.08,58.29 20.77,58.61 17.27,58.61 16.95,58.93 16.95,80.83 16.64,81.15 v14.16,81.15
BOOT  (via drill 0.35)
  Top 0.152: S2.3 51.05,80.9 | 51.05,80.9 S2.4 | 51.05,80.9 R66.2 51.88,78.17 52.32,77.72 52.32,70.87 52.07,70.61 50.29,70.61 49.78,70.1
  Top 0.203: v35.56,45.72 30.23,45.72 30.05,45.55 U4.25 29.97,44.13 v29.97,40.39 | v44.2,48.11 48.87,48.11 49.78,49.02 49.78,70.1
  Top 0.254: v29.72,17.78 34.8,17.78 35.18,18.16 U7.13 35.31,19.95 v35.31,22.1 | J21.4 51.82,8.12 51.56,8.38 v51.69,8.51
  Bottom 0.203: v35.56,45.72 37.85,48.01 44.2,48.01 v44.2,48.11 | v29.97,40.39 31.24,39.12 31.24,37.34 29.72,35.81 v29.72,17.78
  Bottom 0.254: v51.69,8.51 50.42,8.51 49.02,9.91 37.34,9.91 35.31,11.94 v35.31,22.1
CC1
  Top 0.203: R65.2 35.05,8.85 34.56,8.53 J22.A5
CC2
  Top 0.203: R64.2 37.56,9.2 J22.B5
D+1  (1 unrouted)
  Top 0.152: J22.B6 36.56,14.1 U7.5 | 35.56,6.86 35.56,5.84 35.81,5.59 36.32,5.59 36.58,5.84 36.58,6.86
D-1
  Top 0.152: J22.A7 36.06,8.38 | 36.06,8.38 36.06,13.21 35.81,13.46 35.81,14.99 36.07,15.24 37.59,15.24 37.72,15.11 U7.6 | J22.B7 35.06,8.14 35.31,8.38 36.06,8.38
  Top 0.305: J22.A7
ERR_LED
  Top 0.203: 50.35,39.31 50.29,39.37 37.85,39.37 37.59,39.62 37.59,44.13 U4.31
  Top 0.254: D4.C 51.56,33.21 50.93,33.85 50.93,38.73 50.35,39.31
GND  (via drill 0.35)
  Top 0.203: C8.1 24.89,39.52 J19.GND2
  Top 0.254: v18.73,60.07 15.94,60.07 C3.-
  other vias: 33.15,87.82 34.42,83.69 28.07,81.79 45.85,81.47 33.15,90.36 38.54,83.69 38.23,68.14 25.21,26.86 32.83,25.59 26.73,19.05 30.29,13.53 54.86,68.2 32.19,30.29 40.96,11.68 42.42,8.13 39.75,17.97 43.62,12.89 29.53,4.51 34.73,73.53 36,77.98 44.89,74.8 29.65,90.36 36.96,90.36 26.8,90.04 25.53,86.23 25.53,57.98 51.88,39.88 38.35,34.23 24.19,7.94 23.24,11.11 16.89,6.92 22.99,56.39 27.37,31.5 22.73,31.24 10.1,10.86 20.7,34.92 27.62,35.12 17.72,64.64 17.91,72.58 20.45,55.44 11.68,53.98 11.49,49.97 8.06,42.04 33.66,50.1 25.65,52.13 32.64,34.67 43.5,37.08 25.21,35.05 22.86,29.65 22.03,35.12 21.97,28 38.23,63.94 32.13,91.88 29.78,11.75 51.88,3.11 6.92,30.54 8.19,33.85 8.45,25.97 8.19,22.42 9.46,14.03 18.1,12.51 25.72,13.27 25.78,63.31 28.32,61.28 28.57,63.31 19.94,67.63 37.72,73.98 54.48,74.23 53.21,69.15 48.39,64.83 19.94,81.47 18.41,87.82 15.88,86.8 19.94,92.14 25.02,92.39 38.23,92.39 41.53,92.39 8,90.61 5.21,88.84 5.97,81.98 5.71,68.26 1.65,66.74 13.08,69.02 13.59,72.33 13.59,74.61 13.34,77.91 17.91,78.42 36.39,4.64 31.31,8.06 29.27,9.59 38.67,11.62
  pour Top: 47,42.91 46.99,42.94 46.99,62.47 47,62.5 47.49,62.98 47.51,62.99 95,62.99 95,95 0.25,95 0.25,0.25 95,0.25 95,42.67 47.26,42.67 47.23,42.68
  pour Bottom: 60.2,0.25 60.2,42.16 47.05,42.16 47.02,42.18 47,42.2 46.99,42.23 46.99,62.93 47,62.96 47.02,62.98 47.05,62.99 60.2,62.99 60.2,95 0.25,95 0.25,0.25
GPIO1  (via drill 0.35)
  Top 0.203: Q1.2 10.32,17.65 R16.2 13.34,14.67 21.14,14.67 v21.14,19.49
  Top 0.254: U4.27 32.59,42.82 v32.51,42.74
  Bottom 0.203: v21.14,19.49 21.91,19.49 28.89,26.48 28.89,40.58 30.1,41.78 32.19,41.78 32.51,42.1 v32.51,42.74
GPIO2  (via drill 0.35)
  Top 0.203: v20.38,22.99 20.13,22.99 16.32,19.18 12.7,19.18 12.1,19.77 R25.2 11.35,21.14 Q2.2
  Top 0.254: U4.26 31.32,42.82 v31.24,42.74
  Bottom 0.203: v31.24,42.74 30.67,42.16 28.7,42.16 26.23,39.69 26.23,24.83 24.38,22.99 v20.38,22.99
GPIO3  (via drill 0.35)
  Top 0.203: Q3.2 10.53,24.64 R27.2 13.36,23.41 16.83,23.41 17.8,24.38 v18.54,24.38 | U4.29 35.13,43.1 v35.31,42.93 | v36.32,36.83 36.32,34.54 35.81,34.04 21.84,34.04 20.32,32.51 v20.32,26.67
  Bottom 0.203: v35.31,42.93 36.32,41.91 v36.32,36.83 | v18.54,24.38 20.07,24.38 20.32,24.64 v20.32,26.67
GPIO4  (via drill 0.35)
  Top 0.203: v18.61,29.97 18.61,27.81 12.89,27.81 12.04,28.79 R29.2 12.28,29.14 | v30.29,50.04 33.27,53.02 33.27,56.64 33.53,56.9 40.39,56.9 42.93,59.44 42.93,62.04 U4.4
  Top 0.406: Q4.2 12.28,29.14
  Bottom 0.203: v18.61,29.97 18.61,30.54 19.66,31.6 19.66,48.62 19.98,48.93 29.74,48.93 30.21,49.4 30.21,49.96 v30.29,50.04
GPIO5  (via drill 0.35)
  Top 0.203: Q5.2 11.29,33.91 18.16,33.91 v18.86,33.21 | v30.29,51.31 32.77,53.78 32.77,57.15 33.02,57.4 39.62,57.4 41.48,59.26 U4.5 | Q5.2 11.75,32.64 | 11.75,32.64 R31.2 11.75,32.64 | Q5.2 11.75,32.64
  Bottom 0.203: v18.86,33.21 18.86,35.12 19.3,35.56 19.3,48.77 19.82,49.29 28.91,49.29 29.34,49.72 29.34,50.99 29.6,51.26 30.24,51.26 v30.29,51.31
GPIO6  (via drill 0.35)
  Top 0.203: Q6.2 11.56,36.89 R54.2 12,37.27 13.08,36.2 17.61,36.2 v18.37,36.96 | v30.29,52.58 32.26,54.55 32.26,57.66 32.51,57.91 39.12,57.91 40.39,59.18 40.39,62.04 U4.6
  Bottom 0.203: v18.37,36.96 v18.38,36.96 18.95,37.53 18.95,48.92 19.67,49.64 28.31,49.64 28.78,50.11 28.78,52.34 29.02,52.58 v30.29,52.58
GPIO7  (via drill 0.35)
  Top 0.203: 16.7,40.7 13.29,40.7 R55.2 10.53,41.91 Q7.2 | v30.29,53.85 31.75,55.31 31.75,57.91 32.26,58.42 38.35,58.42 38.94,59.01 U4.7
  Top 0.254: 16.7,40.7 17.46,41.47 v18.31,41.47
  Bottom 0.203: v30.29,53.85 28.7,53.85 28.42,53.57 28.42,50.52 27.9,50 19.52,50 18.57,49.05 18.57,48.68 18.57,41.47 v18.31,41.47
GPIO8  (via drill 0.35)
  Top 0.203: Q8.2 11.29,46.16 R56.2 12,46.74 v13.84,48.58 | v30.29,55.12 31.24,56.07 31.24,58.17 32,58.93 37.59,58.93 37.85,59.18 37.85,62.04 U4.8
  Bottom 0.203: v13.84,48.58 14.35,49.09 15.88,49.09 17.4,50.61 27.75,50.61 28.07,50.93 28.07,54.8 28.38,55.12 v30.29,55.12
GPIO-1
  Top 0.203: J15.2 3.81,20.32 4.32,19.81 5.84,19.81 6.86,18.8 6.86,17.27 7.43,16.7
GPIO-2
  Top 0.203: J16.2 4.57,27.94 4.57,23.62 6.99,21.21 6.99,21.12
GPIO-3
  Top 0.203: 7.92,24.79 5.08,27.62 5.08,33.78 J17.1
GPIO-4
  Top 0.203: 5.63,30.48 5.63,36.02 3.56,38.1 J17.2
GPIO-5
  Top 0.203: 6.39,33.21 6.39,36.85 3.3,39.94 J17.3
GPIO-6
  Top 0.203: 4.87,38.99 4.87,41.17 3.3,42.74 J17.4
GPIO-7
  Top 0.203: 7.92,40.64 7.62,40.64 3.3,44.96 J17.5
GPIO-8  (1 unrouted)
  Top 0.203: Q8.3 7.43,43.94 3.3,48.07 J17.6 | 8.13,43.94 11.94,43.94
  Top 0.254: Q8.3 8.13,43.94
K1-CTL  (via drill 0.35)
  Top 0.203: v54.1,87.63 55.12,88.65 55.12,91.69 56.9,93.47 57.95,93.47 R40.2
  Top 0.254: v35.37,63.69 35.13,63.45 U4.10
  Bottom 0.203: v35.37,63.69 35.37,65.6 40.45,65.6 41.08,66.23 41.08,71.63 41.4,71.94 46.8,71.94 47.75,72.9 47.75,86.55 48.83,87.63 v54.1,87.63
K2-CTL  (via drill 0.35)
  Top 0.203: R41.2 51.34,65 52.2,64.14 v52.96,64.14
  Top 0.254: U4.9 36.4,59.64 v36.32,59.56
  Bottom 0.203: v36.32,59.56 36.32,53.85 36.64,53.53 50.61,53.53 52.96,55.88 v52.96,64.14
K3-CTL  (via drill 0.35)
  Top 0.203: R44.2 49.44,42.32 v49.02,42.74
  Top 0.254: U4.11 33.86,59.64 v33.78,59.56
  Bottom 0.203: v33.78,59.56 33.78,53.21 34.02,52.97 47.41,52.97 47.83,52.55 47.83,42.98 48.07,42.74 v49.02,42.74
K4-CTL  (via drill 0.35)
  Top 0.203: v55.12,29.46 R45.2
  Top 0.254: U4.12 32.59,59.64 v32.51,59.56
  Bottom 0.203: v32.51,59.56 32.51,57.02 33.19,56.35 33.19,53.17 33.74,52.62 46.95,52.62 47.47,52.09 47.47,30 48.32,29.15 54.8,29.15 v55.12,29.46
M-PWRKEY  (via drill 0.35)
  Top 0.203: J19.PWRKEY 29.97,38.86 28.96,39.88 v28.96,42.93 | v29.97,47.5 U4.24
  Bottom 0.203: v28.96,42.93 28.96,44.96 29.97,45.97 v29.97,47.5
M-SCL  (via drill 0.35)
  Top 0.203: U4.36 43.94,44.29 v43.94,46.86 43.81,46.74 24.55,46.74 R15.2 24.34,45.59 22.35,45.59 22.04,45.28 22.04,44.71 U3.P3
  Bottom 0.203: v43.94,46.86 46.04,46.86 46.61,46.29 46.61,30.92
M-SDA  (via drill 0.35)
  Top 0.203: U3.P4 24.27,42.87 R14.2 24.39,42.16 24.64,41.91 27.69,41.91 28.07,42.29 28.07,45.55 28.89,46.38 39.34,46.38 v40.13,45.59
  Top 0.254: U4.33 40.13,44.29 v40.13,45.59
  Bottom 0.203: v40.13,45.59 45.59,45.59 45.91,45.28 45.91,30.1
M-SIMRX
  Top 0.203: U4.30 36.4,42.24 35.31,41.15 33.02,41.15 32.51,40.64 J19.TX
M-SIMTX  (via drill 0.35)
  Top 0.203: U4.28 33.86,43.1 34.8,42.16 v34.67,42.04
  Bottom 0.203: v34.67,42.04 35.05,41.66 J19.RX
M-UART0RX  (via drill 0.35)
  Top 0.152: v20.57,12.19 20.57,11.15 U$2.TX
  Top 0.203: U$2.TX 18.99,11.11 18.03,10.16 SJ1.1 | D12.C 51.68,16.76 32.51,16.76 | 32.51,16.76 32.51,14.35 U7.2 | v31.24,17.02 31.5,16.76 32.51,16.76 | v41.4,41.4 41.4,44.13 U4.34
  Top 0.254: J21.2 53.85,5.82 v53.85,7.87 | v52.83,16 53.09,16 52.83,15.75 D12.C
  Bottom 0.152: v31.24,17.02 28.7,17.02 27.94,16.26 27.94,13.72 26.42,12.19 v20.57,12.19
  Bottom 0.203: v41.4,41.4 41.4,36.32 40.89,35.81 31.75,35.81 31.24,35.31 v31.24,17.02
  Bottom 0.254: v53.85,7.87 53.85,14.99 v52.83,16
M-UART0TX  (via drill 0.35)
  Top 0.203: U$2.RX 20.55,6.51 | SJ2.1 18.29,5.08 19.56,5.08 20.38,5.91 v20.38,6.35 | D11.C 51.68,12.56 51.56,12.45 45.47,12.45 44.7,13.21 44.7,15.24 43.94,16 34.04,16 v33.78,15.75 33.78,14.35 U7.3 | v42.67,41.4 42.67,44.13 U4.35
  Top 0.254: 20.55,6.51 v20.38,6.35 | J21.3 52.83,5.8 v52.83,7.62 | v52.83,13.97 D11.C
  Bottom 0.203: v20.38,6.35 20.64,6.6 28.64,6.6 33.78,11.75 v33.78,15.75 33.78,34.54 34.54,35.31 41.91,35.31 42.67,36.07 v42.67,41.4
  Bottom 0.254: v52.83,7.62 v52.83,13.97
MT-CK  (via drill 0.35)
  Top 0.152: J23.4 50.94,89.31 v50.94,86.87
  Top 0.254: v31.29,60.52 31.29,58.99 29.96,57.66 U4.16
  Bottom 0.152: 49.02,70.29 50.94,72.21 v50.94,86.87
  Bottom 0.203: 42.99,60.64 42.99,69.09 44.2,70.29 49.02,70.29
  Bottom 0.254: 42.99,60.64 43.12,60.52 v31.29,60.52
MT-DI  (via drill 0.35)
  Top 0.152: J23.2 48.79,85.39 48.79,83.67 v48.9,83.57
  Top 0.254: U4.14 30.05,63.45 30.61,64.01 33.47,64.01 33.78,64.33 33.78,65.28 34.1,65.6 v41.72,65.6
  Bottom 0.203: v41.72,65.6 41.72,70.99 42.04,71.31 47.62,71.31 48.9,72.58 v48.9,83.57
MT-DO-K5-CTL  (via drill 0.35)
  Top 0.152: J23.5 51.82,89.44 v51.82,85.6
  Top 0.203: 32.77,48.77 v32.77,47.75 | v52.07,11.18 52.07,11.43 53.55,12.91 53.58,13.83 R48.2
  Top 0.254: U4.23 32.77,48.77 45.21,48.77 46.16,49.72 v46.16,58.93
  Bottom 0.152: 46.16,68.52 46.16,69.03 46.74,69.6 50.29,69.6 51.82,71.12 v51.82,85.6
  Bottom 0.203: v32.77,47.75 32.77,44.2 33.27,43.69 44.2,43.69 44.45,43.43 44.45,11.18 v52.07,11.18 | v46.16,58.93 46.16,68.52
MT-MS  (via drill 0.35)
  Top 0.152: J23.3 49.79,86.11 v49.78,86.11
  Top 0.254: U4.13 31.32,63.14 31.56,63.37 33.78,63.37 34.73,64.33 34.73,64.64 35.05,64.96 41.4,64.96 42.04,64.33 v42.35,64.33
  Bottom 0.152: v49.78,86.11 49.78,80.26
  Bottom 0.203: v42.35,64.33 42.35,70.36 42.67,70.67 48.2,70.67 49.78,72.26 49.78,80.26
N$1  (via drill 0.61)
  Top 0.61: D5.A 11.39,90.76 11.37,90.74 11.37,88.77 v11.3,88.71 11.05,88.46 8.57,88.46 3.68,83.57 J20.1
  Bottom 0.61: JP1.1 11.3,86.26 v11.3,88.71
N$2
  Top 0.203: 13.27,55.37 13.27,55.88 | FB3.1 13.27,54.61
  Top 0.254: U1.3 14.78,57.66 13.27,56.15 13.27,55.88 | 13.27,55.37 | 13.27,54.61 13.27,55.37
N$3
  Top 0.914: 61.93,82.15 K1.1
  Top 1.016: J6.1 92.46,75.18 92.46,80.52 91.19,81.79 86.19,81.79 RELAY1.2 61.95,82.12 61.93,82.15
N$4
  Top 0.203: FB4.1 15.05,50.86 14.73,50.55 14.73,52.83 15.11,53.21 U2.3
N$5  (via drill 0.35)
  other vias: 15.49,47.5
N$6
  Top 0.254: R9.1 D2.A
N$7
  Top 0.203: R63.1 D11.A
N$9
  Top 0.61: L1.2 40.35,88.56 39.5,89.41 F1.1 28.38,89.32 28.38,86.55 26.54,84.71 C9.+ 26.54,82.17 25.73,81.36 IC2.4
N$10
  Top 0.203: U2.8 FB5.1
N$11
  Top 0.203: K2.5 63.81,71.12 57.72,71.12 R42.1 56.42,70.65 56.39,70.61 56.39,65.09 Q-K2.3 56.77,60.51 57.09,60.2 D6.A
N$12
  Top 0.254: R12.1 D3.A
N$13
  Top 0.254: R13.1 D4.A
N$14
  Top 0.152: R43.1 57.66,84.19 57.66,88.65 58.35,89.34 Q-K1.3 | K1.5 67.21,88.24 SG1.-
  Top 0.203: D7.A 56.13,76.26 56.13,83.82 56.41,84.1 R43.1 | Q-K1.3 58.65,89.09 62.99,89.09 K1.5
N$15
  Top 0.254: U1.8 FB6.1
N$16
  Top 0.203: D-K2.C 58.29,66.74 R42.2
N$17
  Top 0.203: R43.2 57.57,80.75 D-K1.C
N$18
  Top 0.152: 57.66,90.17 56.41,90.17 Q-K1.1
  Top 0.203: R40.1 58.29,90.81 57.66,90.17
N$19
  Top 0.203: R62.1 D12.A
N$20
  Top 0.203: R41.1 Q-K2.1
N$21
  Top 0.203: Q-K4.3 57.47,23.62 D8.A 56.33,26.8 56.33,34.38 R46.1 57.53,36.34 57.99,36.8 K4.5
N$22
  Top 0.203: R47.1 57.47,53.98 | 57.47,53.98 57.47,54.74 63.05,54.74 K3.5 | 58.1,42 58.1,43.67 D9.A 56.77,44.19 56.01,44.96 56.01,53.15 56.83,53.98 57.47,53.98
  Top 0.254: Q-K3.3 58.1,42
N$23
  Top 0.203: R46.2 57.59,33.72 D-K4.C
N$24
  Top 0.203: R47.2 57.47,50.08 D-K3.C
N$25
  Top 0.203: R44.1 52.86,43.08 55.69,43.08 Q-K3.1
N$26
  Top 0.203: Q-K4.1 55.12,24.82 R45.1
N$27
  Top 1.016: K4.1 61.85,30.81 RELAY4.2 92.54,30.81 92.71,30.99 | J8.2 92.71,30.99 | 92.71,30.99 J9.1
N$28
  Top 1.016: K4.3 84.84,24.8 RELAY4.3
N$29
  Top 1.016: J6.2 92.71,65.02 | 92.71,65.02 J7.1 | 92.71,65.02 92.63,65.1 RELAY2.2 61.85,65.1 K2.1
N$30
  Top 1.016: K2.3 84.84,59.09 RELAY2.3
N$31
  Top 1.016: K2.4 84.86,71.09 RELAY2.1
N$33
  Top 1.016: K1.3 84.97,76.24 RELAY1.3
N$34
  Top 1.016: K1.4 84.74,88.24 RELAY1.1
N$35
  Top 1.016: K4.4 84.86,36.8 RELAY4.1
N$36
  Top 1.016: J7.2 92.71,47.75 | 92.71,47.75 J8.1 | 92.71,47.75 92.63,47.83 RELAY3.2 85.74,47.95 K3.1
N$37
  Top 0.914: K3.3 84.52,41.95
  Top 1.016: 84.52,41.95 84.97,41.95 RELAY3.3
N$38
  Top 1.016: K3.4 84.74,53.95 RELAY3.1
N$39
  Top 0.203: 56,10.41 Q-K5.3 | R49.1 | R49.1 57.53,19.68 63.81,19.68 K5.5 | D10.A 57.4,8.88 56.9,8.88 56.78,8.88 | 56.9,18.61 R49.1
  Top 0.254: 56.9,8.88 56.14,8.88 55.88,9.14 55.88,10.29 56,10.41 | Q-K5.3 56.07,10.58 56.07,17.78 56.9,18.61 | 56.78,8.88 57.4,8.88
N$40
  Top 0.203: R49.2 D-K5.C
N$41
  Top 0.203: R48.1 53.8,12.15 Q-K5.1
N$42
  Top 1.016: K5.1 85.74,13.66 RELAY5.2 91.01,13.54 92.71,15.24 J9.2
N$43
  Top 1.016: K5.3 84.97,7.66 RELAY5.3
N$44
  Top 1.016: K5.4 84.74,19.66 RELAY5.1
N$45
  Top 0.152: J1.1 5.84,58.67 6.48,58.04 R26.2
N$46
  Top 0.254: R60.1 25.21,5.46 26.1,6.35 26.1,7.3 U$2.VREF 28.11,7.3 C16.1 28.32,13.02 27.24,14.1 24.54,14.1 R61.2
N$47
  Top 0.203: R60.2 19.91,3.3 SJ2.2 7.37,3.3 6.35,4.32 6.35,8.13
  Top 0.254: U$2.CANH 22.29,9.84 22.07,9.63 R60.2
  Top 0.305: J10.1 6.35,8.13
N$48
  Top 0.203: 20.04,13.59 19.43,13.59 18.8,12.95 18.8,12.19 18.29,11.68 SJ1.2 15.24,11.68 14.73,12.19 6.86,12.19 6.6,12.45 6.6,12.7 5.59,13.72
  Top 0.254: U$2.CANL 27.37,8.57 27.69,8.89 27.69,12.06 27.37,12.38 22.29,12.38 22.2,12.47 R61.1 20.04,13.59 | J10.2 5.59,13.72
N$49
  Top 0.203: Q3.3 10.41,24.19 12.31,22.3 R18.1
N$50
  Top 0.203: Q4.3 10.67,28.19 12,26.86 R19.1
N$51
  Top 0.203: Q5.3 11.68,31.69 12.06,31.31 R20.1
N$52
  Top 0.203: Q6.3 11.68,35.94 12.1,35.52 R57.1
N$53
  Top 0.203: Q7.3 11.68,40.45 12.1,40.03 R58.1
N$55
  Top 0.203: Q1.3 10.41,16.7 11.09,16.03 11.09,14.48 R21.1
N$57
  Top 0.203: R11.1 12.1,18.5 10.41,20.19 Q2.3
ONLINE_LED
  Top 0.254: U4.37 45.29,41.39 45.85,40.83 52.51,40.83 52.83,40.51 52.83,36.07 52.51,35.75 D3.C
OUT
  Top 0.762: D1.C 48.07,78.61 42.04,78.61 40.98,77.56 L1.1
  Top 0.914: IC2.2 29.13,79.68 29.97,80.52 40.13,80.52 40.77,79.88 L1.1
RESET  (via drill 0.35)
  Top 0.203: S1.4 18.86,76.07 S1.3 | R17.2 20.77,76.01 20.83,76.07
  Top 0.254: 18.86,76.07 20.83,76.07 32.51,76.07 33.47,75.12 33.47,66.86 34,66.33 C11.1 44.26,66.21 44.26,62.45 U4.3 44.02,50.37 v43.94,50.29 | U7.14 33.91,20.07 33.91,20.45 | 33.91,20.45 v30.61,23.75 | J21.5 50.8,5.82 v50.8,7.37 | v34.54,21.34 33.91,20.7 33.91,20.45
  Bottom 0.203: v43.94,50.29 42.93,49.28 32.26,49.28 31.75,48.77 31.75,44.7 33.78,42.67 33.78,37.08 33.02,36.32 31.24,36.32 30.61,35.69 v30.61,23.75
  Bottom 0.254: v50.8,7.37 49.78,7.37 48.13,9.02 37.21,9.02 34.54,11.68 v34.54,21.34
SCL
  Top 0.203: R22.2 24.31,48.4 22.77,46.86 22.04,46.86 22.04,47.71 U3.P6 21.89,47.85 21.89,49.23 21.65,49.47 19.11,49.47 18.22,50.35 18.22,53.85 | U2.10 18.59,54.21 18.22,53.85 | 18.22,53.85 18.22,58.29 18.59,58.66 U1.10 19.81,58.87 J18.1
SDA
  Top 0.203: U3.P5 22.48,49.27 | 22.48,49.27 22.48,49.91 22.35,50.04 19.18,50.04 18.86,50.35 18.86,53.53 19.04,53.71 U2.9 20.63,53.71 20.77,53.86 20.77,54.47 20.45,54.8 18.86,54.8 18.58,55.08 18.58,57.66 19.08,58.16 U1.9 20.63,58.16 21.08,58.61 21.08,60.52 J18.2 | R23.2 23.88,50.67 22.48,49.27
VIN-DC  (via drill 0.61)
  Top 0.254: IC2.1 31.24,77.65 31.24,77.34 | R51.2 8.44,85.27 v9.96,85.27
  Top 0.61: C4.+ 21.97,87.88 18.48,91.38 D5.C 15.75,91.33 15.75,89.92 12.89,87.06 11.75,87.06 v9.96,85.27
  Top 0.762: 31.24,77.34 v33.15,77.34
  Bottom 0.61: v33.15,77.34 33.15,80.52 29.53,84.14 C4.+ | JP1.2 10.38,85.19 10.29,85.28 10.27,85.27 v9.96,85.27

## Text on the board
tNames: GND | VIN
bNames: NuvIoT - PRD-RLY / by Software Logistics / REV - 005 / March - 2022